# Altium PCB MSP430_GPRS_1.PcbDoc
Units mil, origin at the board's own origin, x right, y up, seen from the top; angles counter-clockwise.
Board outline 1335.03 x 1920.01 mil, 2 copper layers (Top Layer, Bottom Layer); 12 components, 6 nets, 31 pads, 1 vias.
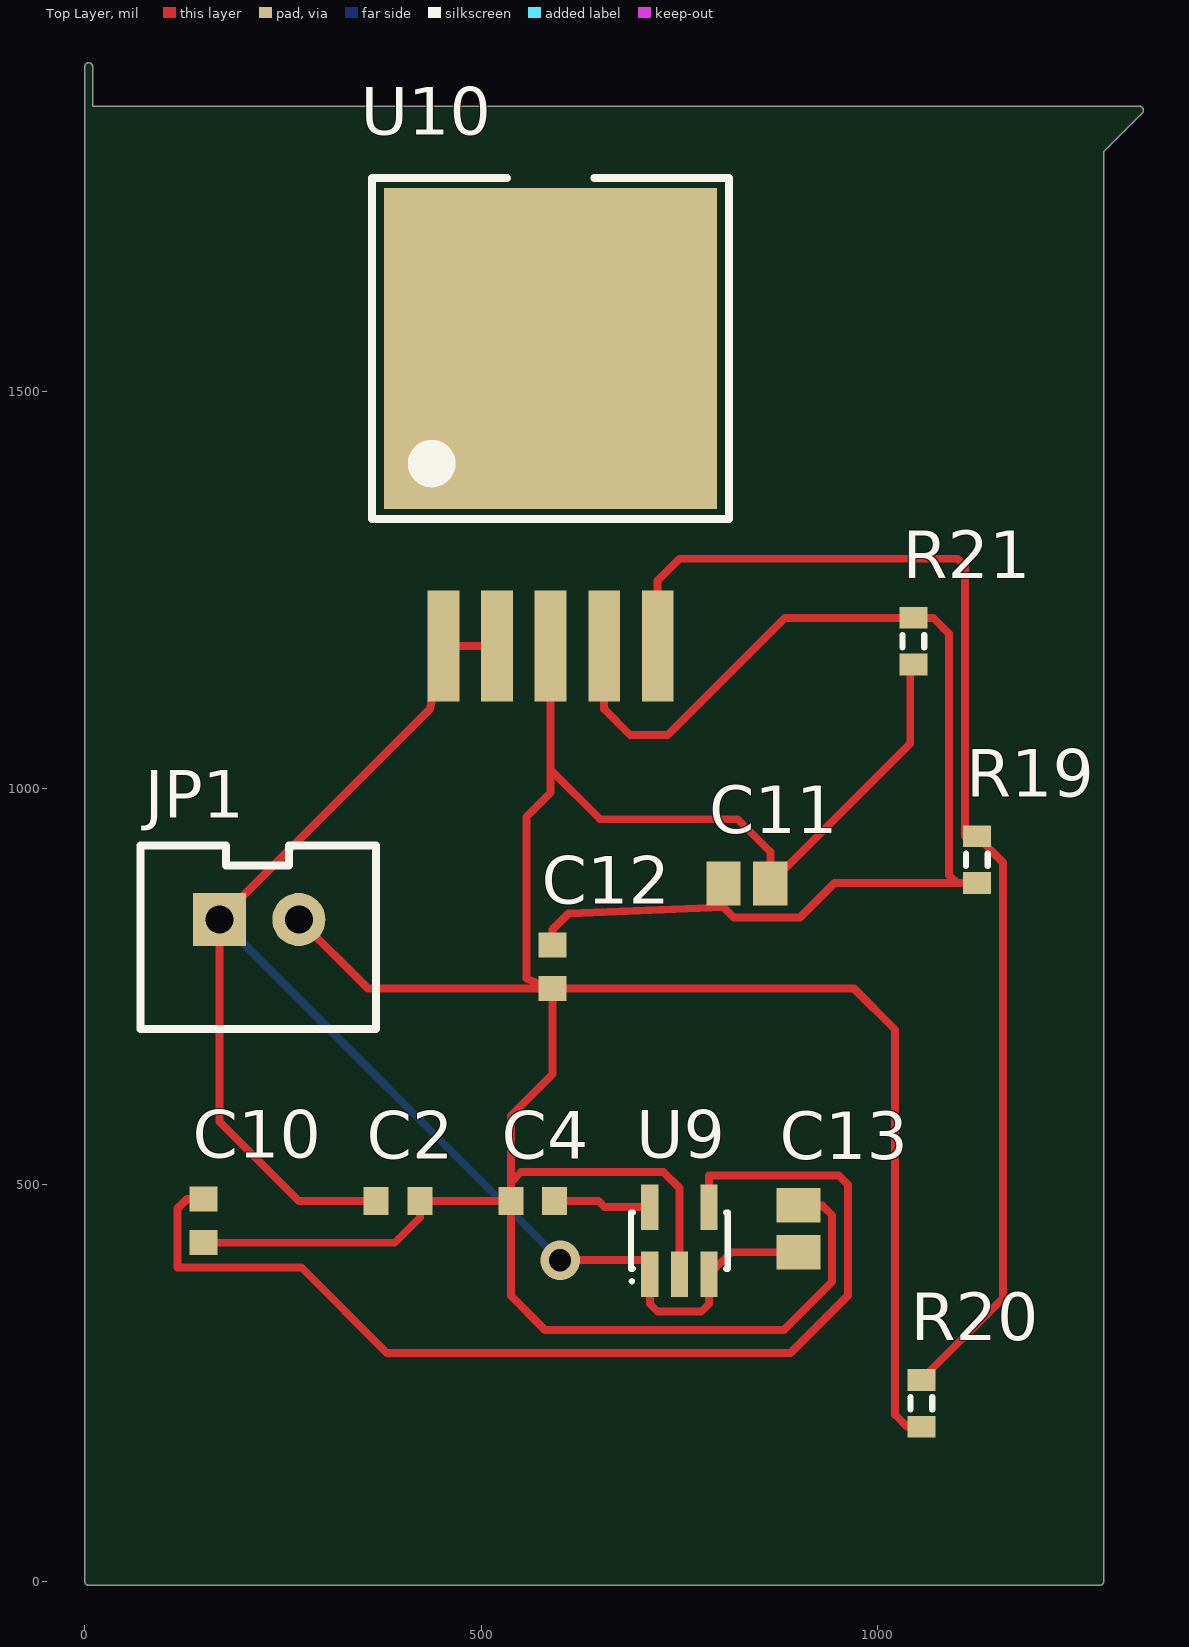
[diagram p0: Top Layer view]
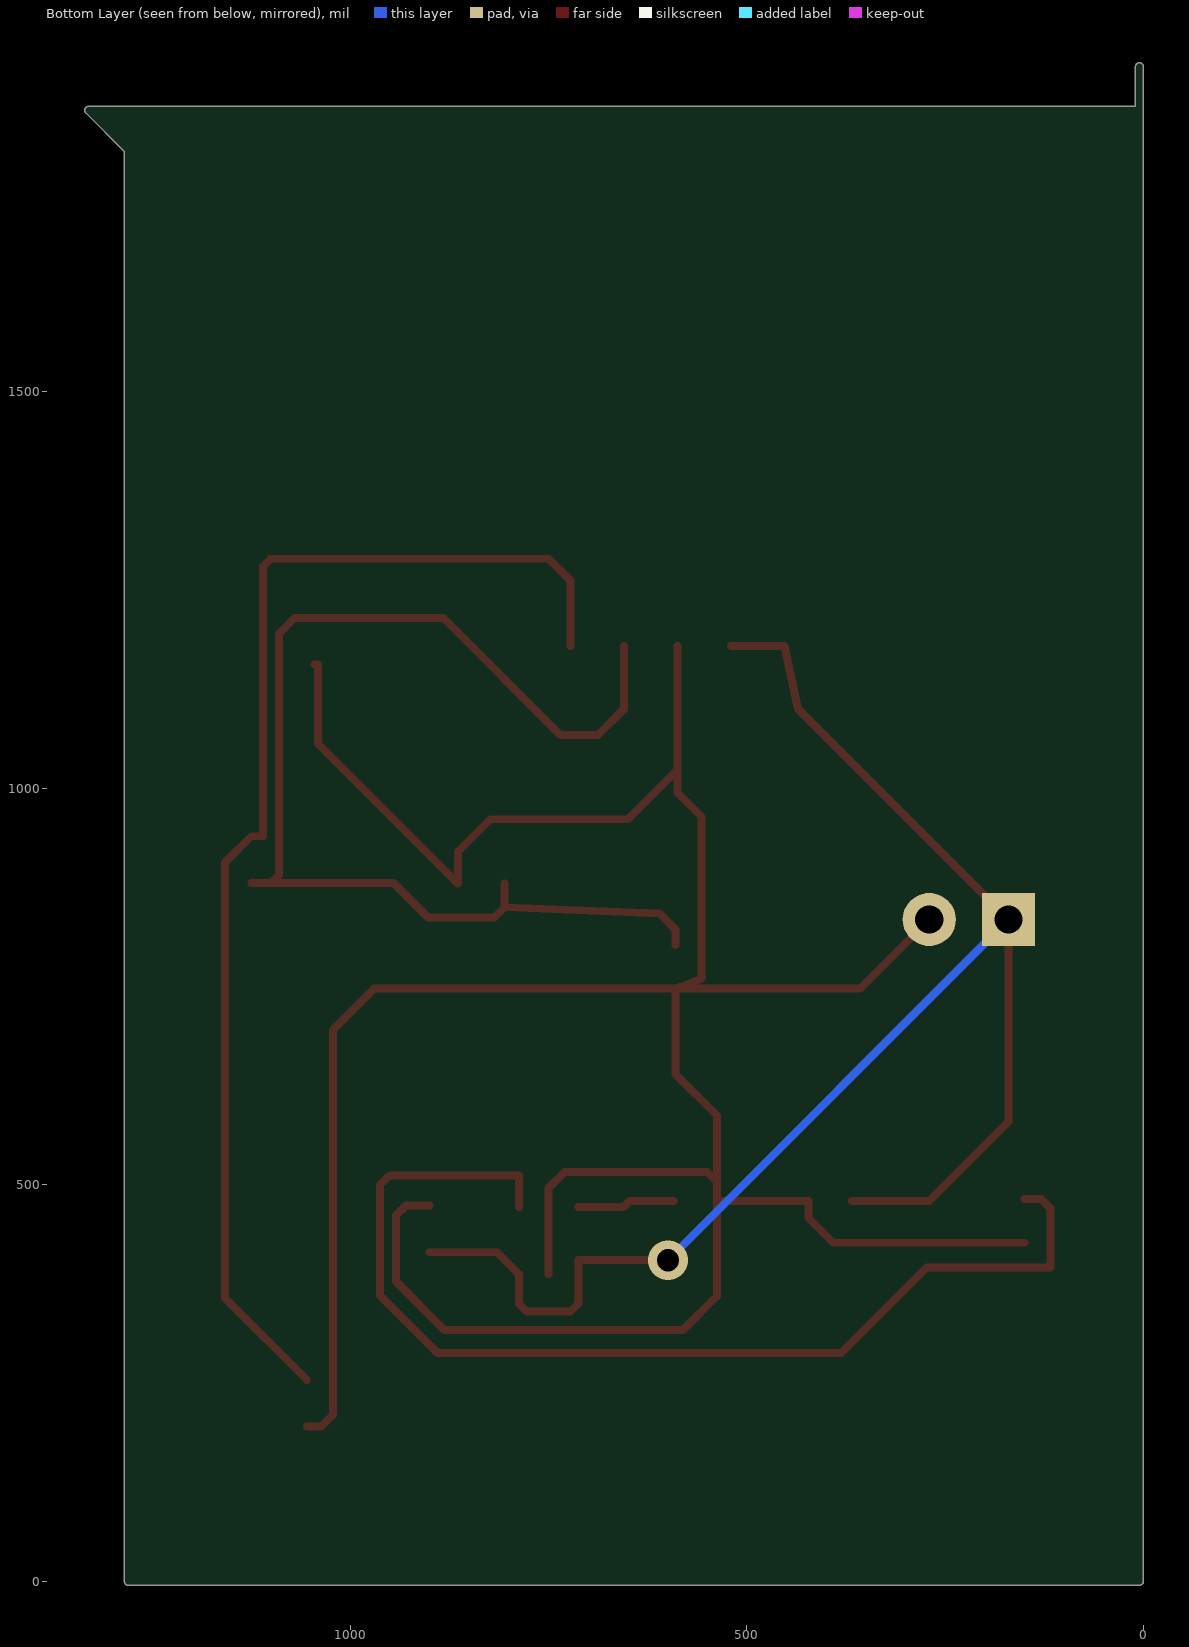
[diagram p1: Bottom Layer view, seen from below]

## Layer stack, top to bottom
Top Solder: solder mask 0.4, Solder Resist, Dk 3.5
Top Layer: signal copper 1.4
Dielectric 1: dielectric 12.6, FR-4, Dk 4.8
Bottom Layer: signal copper 1.4
Bottom Solder: solder mask 0.4, Solder Resist, Dk 3.5

## Board outline
-0.01,0 ccw(c5,0) 5,-5.01 1280,-5.01 ccw(c1280,0) 1285.02,0 1285.02,1802.92 1333.55,1851.45 1333.53,1851.44 ccw(c1330,1855) 1335.02,1855 ccw(c1330,1855) 1330,1860.02 10.01,1860.02 10.01,1910 ccw(c5,1910) -0.01,1910

## Design rules (kind name [scope] priority, off if disabled: settings)
Clearance [All] p1: gap=10
PolygonConnect [All] p1: connectstyle=Relief reliefconductorwidth=10 reliefentries=4 polygonreliefangle="90 Angle" airgapwidth=10
RoutingVias [All] p1: holewidth=28 width=50 viastyle="Through Hole" minholewidth=28 minwidth=50 maxholewidth=28 maxwidth=50
SolderMaskExpansion [All] p1: expansion=4
Width [All] p1: maxlimit=10 minlimit=10 preferedwidth=10
30 further rules are at their usual default settings.

## Components (designator, comment, footprint, x,y, rotation, side; value= is the part's Value field where it differs from the comment)
C2 "Cap Semi" 1608[0603] 395,479.53 r0 top
C4 "Cap Semi" 1608[0603] 565,479.53 r0 top
C10 "Cap Semi" 1608[0603] 150,454.53 r90 top
C11 "Cap Pol3" C0805 835,880 r0 top
C12 "Cap Semi" 1608[0603] 590,775 r90 top
C13 "Cap Pol3" C0805 900,444.53 r90 top
JP1 "Vin+5V" XH2.54-2P 170,834.53 r0 top
R19 "Res3" J1-0603 1125,910 r90 top
R20 "Res3" J1-0603 1055,224.53 r90 top
R21 "Res3" J1-0603 1045,1185.47 r90 top
U9 "CAT6219" SOT23-5 750,429.53 r0 top
U10 "MIC29302WU" TO263-5 587.5,1439.53 r0 top

## Footprints (in the part's own frame and the unit in brackets; to place one, negate y for a bottom-side part, rotate by r counter-clockwise, add the part's x,y. Pads: shape width x height; smd on the part's side, far side on the other; paste and mask are expansions set on the pad)
1608[0603] [mm] "Chip Capacitor, Body 1.6x0.8mm, IPC High Density"
  rect 0.8x0.9 smd: 1(-0.7,0) 2(0.7,0)
  body extent -0.87,-0.48 0.87,0.48, height 1.3
C0805 [mm] "Chip Capacitor, Body 2.0x1.3mm, IPC High Density"
  rect 1.1x1.4 smd: 1(-0.75,0) 2(0.75,0)
  body extent -1.1,-0.72 1.1,0.72, height 1.4
J1-0603 [mm] "Chip Resistor, Body 1.6x0.8mm, IPC High Density"
  rect 0.7x0.9 smd: 1(-0.75,0) 2(0.75,0)
  silkscreen extent -0.2,-0.35 0.2,0.35, body extent -0.85,-0.48 0.85,0.48, height 0.9
SOT23-5 [mm] "SOT-23/SC-74A; 5 Leads; Body 3 x 3 mm, inc. leads (LxW max)"
  rect 0.55x1.45 smd: 1(-0.95,-1.075) 2(0,-1.075) 3(0.95,-1.075) 4(0.95,1.075) 5(-0.95,1.075)
  silkscreen extent -1.57,-1.35 1.55,0.9, body extent -1.45,-1.4 1.45,1.4, height 1.08
TO263-5 [mil] "D2PACK, TO-263 Case, 5 Lead, SMD Power IC"
  rect 40x140 smd: 1(-135,-260) 2(-67.5,-260) 3(0,-260) 4(67.5,-260) 5(135,-260)
  rect 420x405 smd: ""(0,115)
  silkscreen extent -225,-100 225,330, body extent -200,-260 200,300, height 192
XH2.54-2P [mm] "接插件，2P"
  rect 1.7x1.7 hole 0.9: 1(0,0)
  round 1.7 hole 0.9: 2(2.54,0)
  silkscreen extent -2.54,-3.51 5.01,2.37, body extent -2.5,-3.3 5.04,2.4, height 7.05

## Part data
C2 C4 C10 C12: "Capacitor (Semiconductor SIM Model)"
C11 C13: "Polarized Capacitor (Surface Mount)"
JP1: library part "Header 2", "2P接插件"
R19 R20 R21: "Resistor"
U9: "500 mA CMOS LDO Regulator"
U10: "2A,  adjustable LDO"

## Via types
v1: diameter 50, hole 28, Top Layer to Bottom Layer, 1 vias

## Nets (pads, with @x,y where several pads share a name; then routed paths per layer and width w, separated by ;. In a path a pad name is that pad's centre, name@x,y a point inside that pad or via, vN(x,y) a via of type N, cw(c..) or ccw(c..) an arc to the next point about the centre after c; other vN are vias at no path point)
DC+5V: C2.1 C13.1 JP1.1 U9.1 U9.3 U10.1 U10.2 | length 2038
  Top Layer w10: C2.1 270,479.53 170,579.53 JP1.1 435.47,1100 U10.1 U10.2 ; v1(599.53,405) 712.6,405 U9.1 712.6,350 722.6,340 777.4,340 787.4,350 U9.3 815.2,415 C13.1
  Bottom Layer w10: JP1.1 v1(599.53,405)
GND: C2.2 C4.1 C10.1 C11.2 C12.1 C13.2 JP1.2 R20.1 R21.1 U9.2 U10.3 | length 4259.7
  Top Layer w10: C10.1 390.97,426.97 422.56,458.56 C2.2 C4.1 ; JP1.2 357.09,747.44 C12.1 ; U10.3 587.5,1023.5 ; U9.2 750,496 730,516 550,516 537.44,503.44 ; C13.2 930,474.06 942.56,461.5 942.56,378 881.56,317 580.44,317 537.44,360 C4.1 ; R21.1 1041,1155.94 1041,1056.47 C11.2 864.53,920 823.53,961 650,961 587.5,1023.5 ; R20.1 1037,195 1022,210 1022,695.44 970,747.44 C12.1 ; C4.1 537.44,503.44 ; 537.44,503.44 537.44,587 590,639.56 C12.1 ; 587.5,1023.5 587.5,994.5 557,964 557,760 C12.1
NetC10_2: C10.2 U9.4 | length 1392.1
  Top Layer w10: C10.2 129.09,482.09 117,470 117,396 273,396 381,288 890,288 962.56,360.56 962.56,500 950.56,512 787.4,512 U9.4
NetR19_2: R19.2 R20.2 U10.5 | length 1582.6
  Top Layer w10: U10.5 722.5,1262 750,1289.5 1100.5,1289.5 1110,1280 1110,939.53 R19.2 1158,906.53 1158,357.06 R20.2
VCC4.0: C11.1 C12.2 R19.1 R21.2 U10.4 | length 1532.7
  Top Layer w10: C12.2 590,822 610,842 805.47,850 ; U10.4 655,1100 688,1067 735,1067 883,1215 R21.2 1070,1215 1090,1195 1090,890.47 1100,880.47 ; C11.1 805.47,850 ; R19.1 1100,880.47 ; 805.47,850 818.47,837 902,837 945.47,880.47 1100,880.47
VD3.3: C4.2 U9.5 | length 123.2
  Top Layer w10: C4.2 648,479.53 655.68,471.85 U9.5
pads on no net: U10.